# Altium PCB PenguinPi.PcbDoc
Units mil, origin at the board's own origin, x right, y up, seen from the top; angles counter-clockwise.
Board outline 2559.11 x 3103.94 mil, 2 copper layers (Top Layer, Bottom Layer); 47 components, 56 nets, 233 pads, 54 vias.
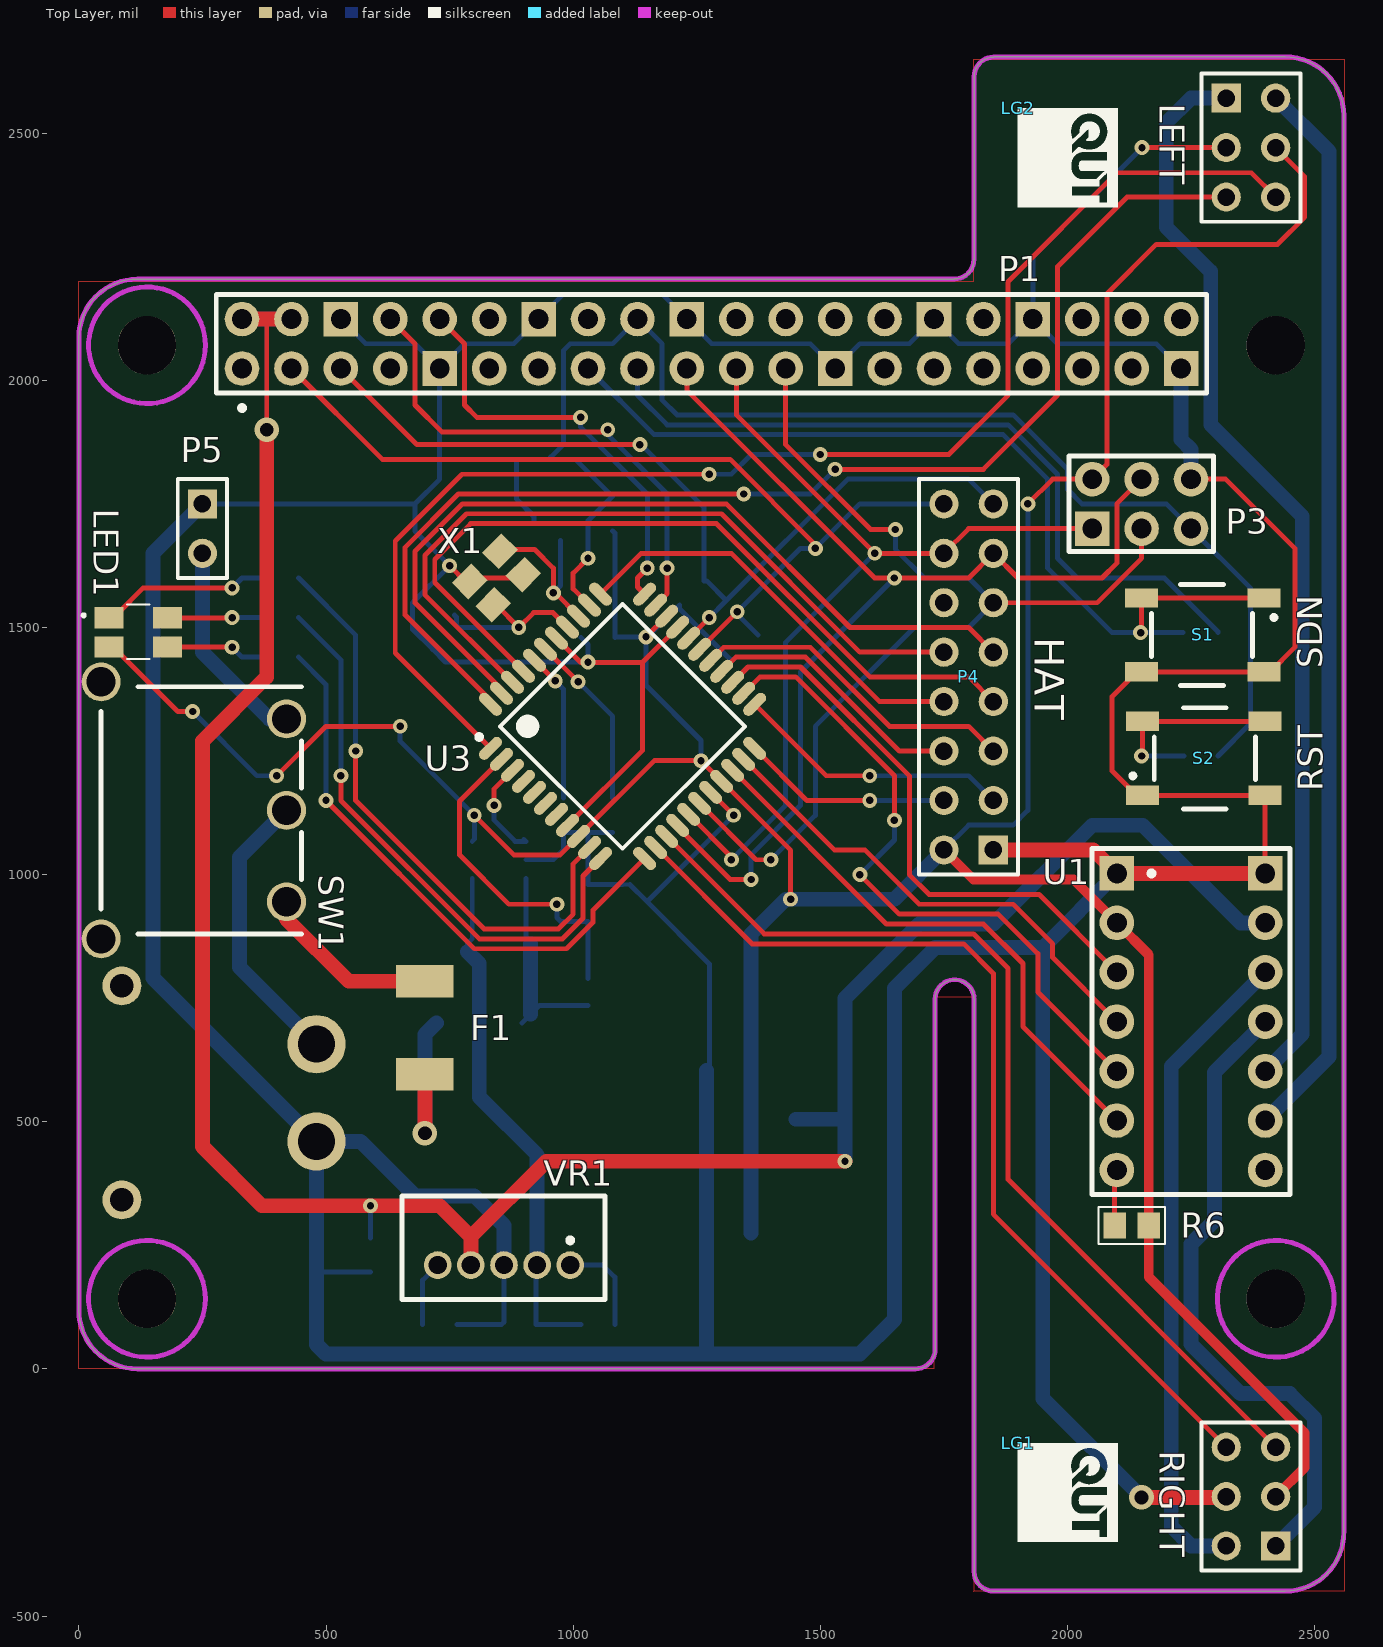
[diagram p0: Top Layer view]
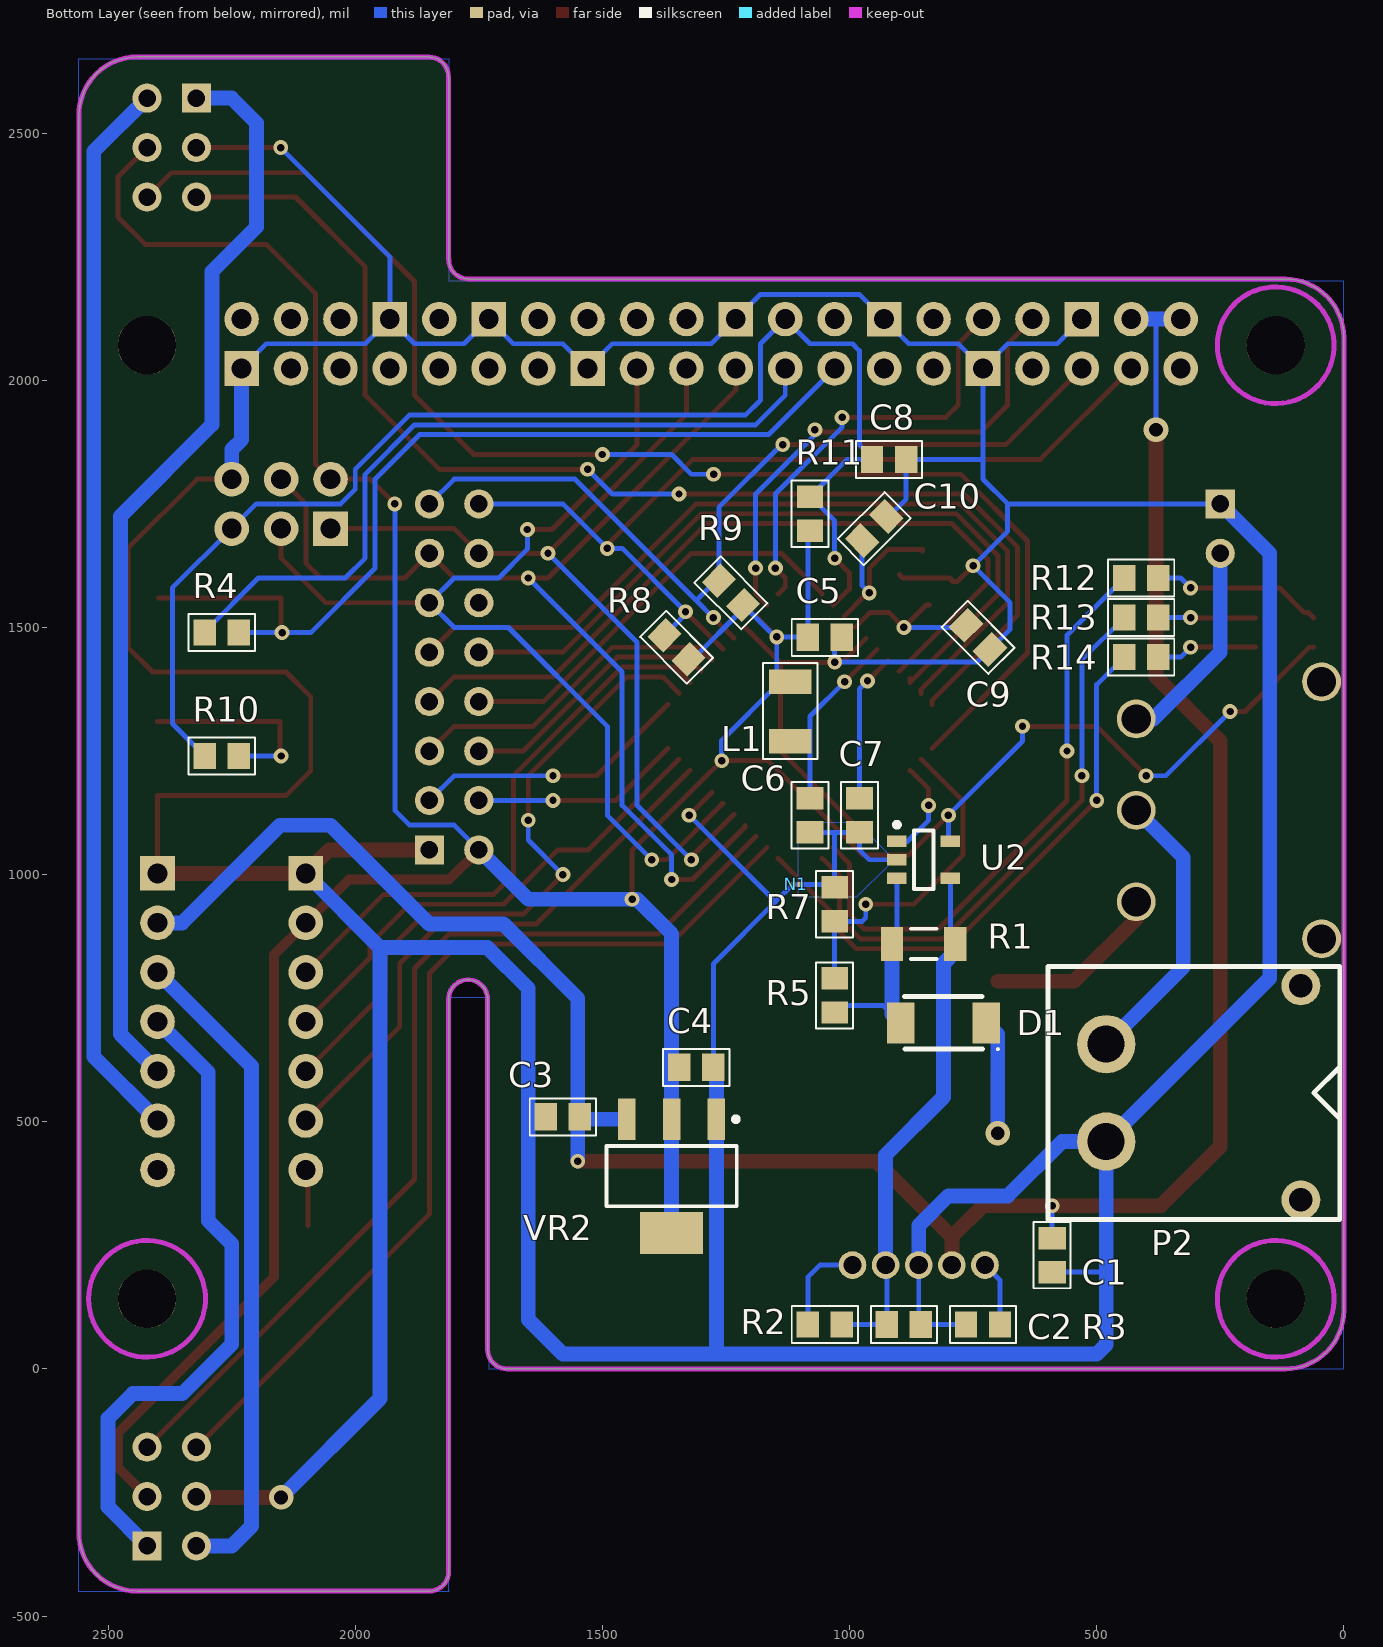
[diagram p1: Bottom Layer view, seen from below]
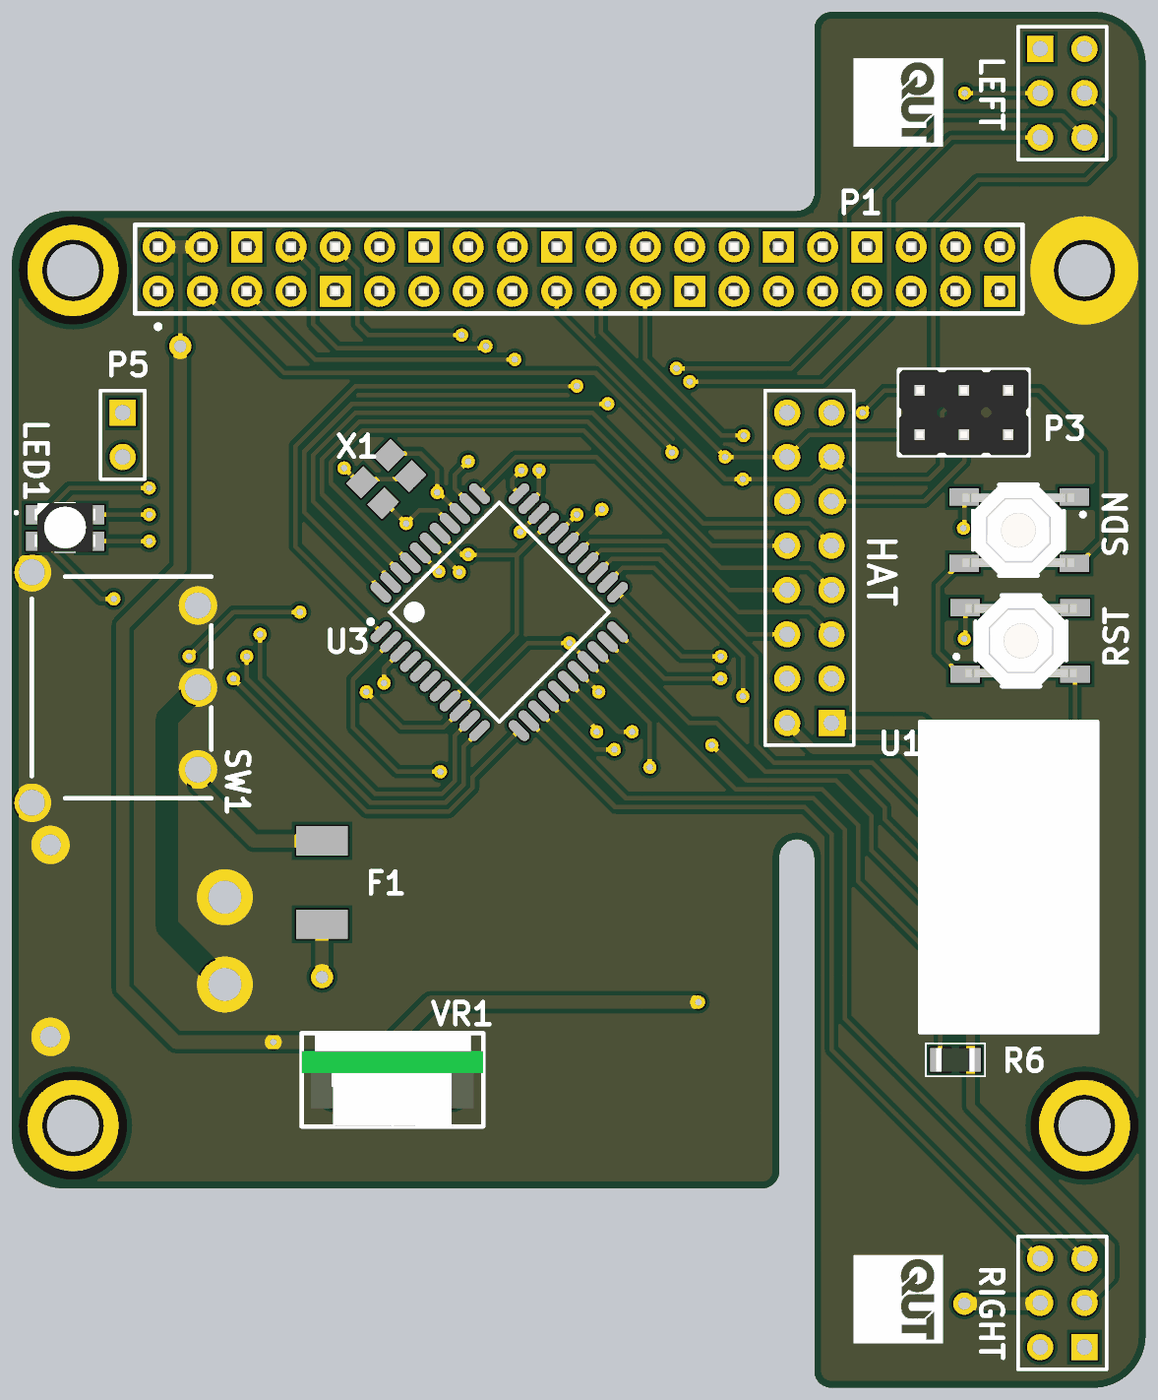
[diagram p2: 3D render of the assembled board from above, using the file's embedded part models]
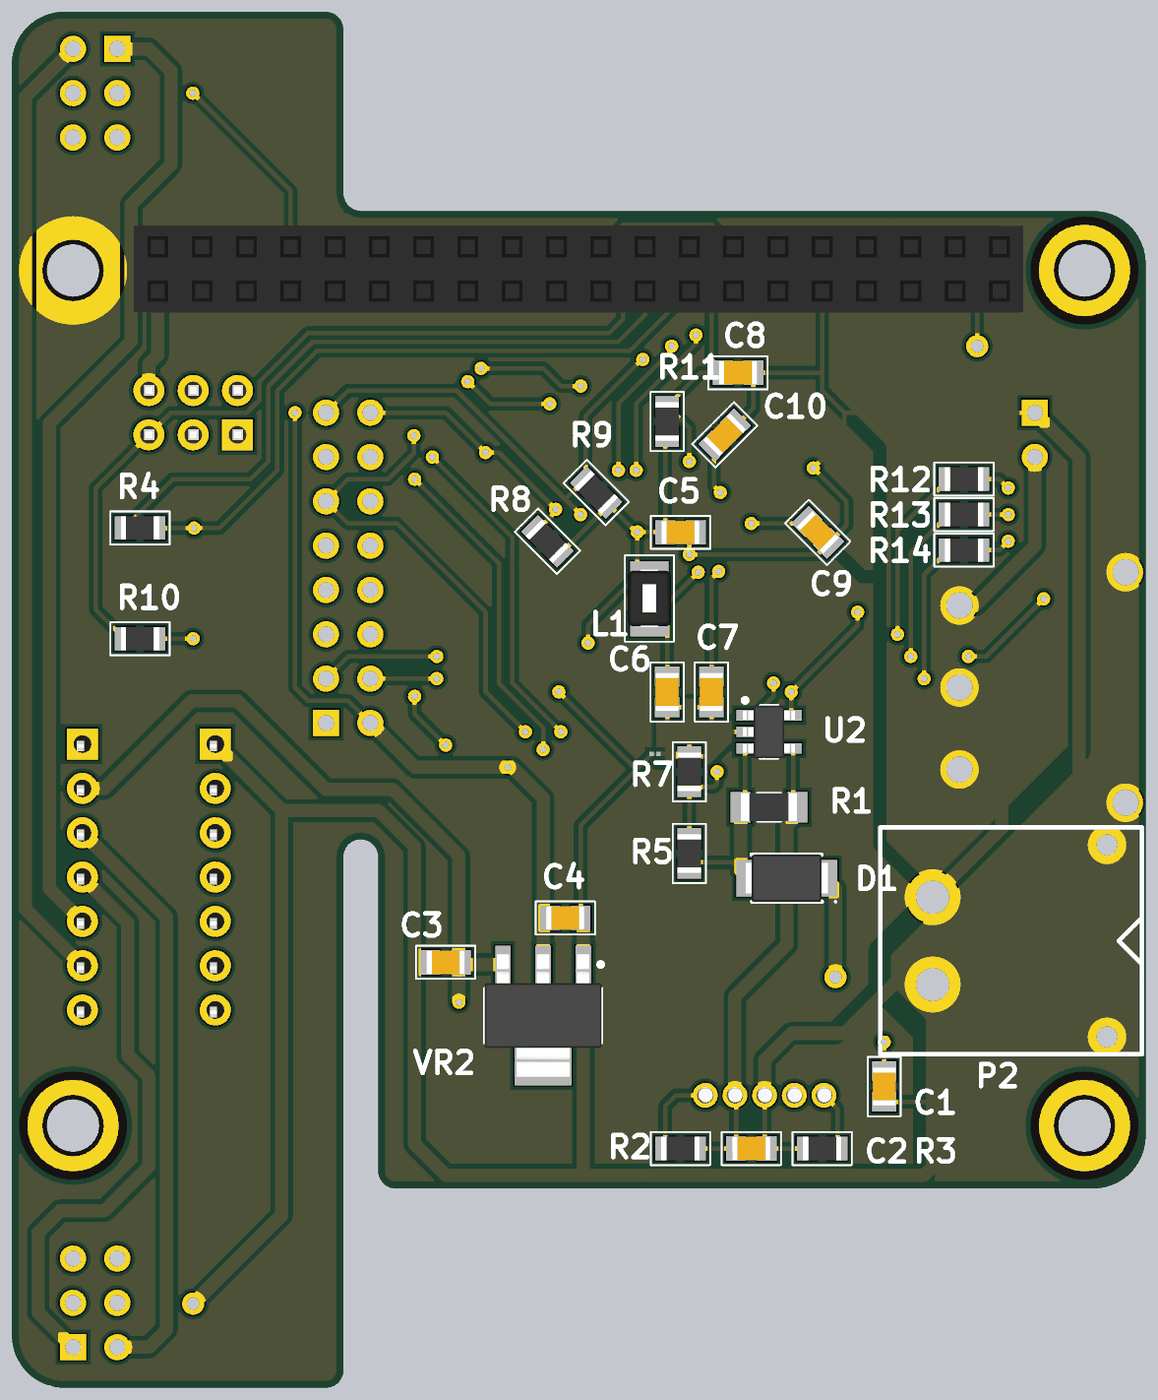
[diagram p3: 3D render of the assembled board from below, using the file's embedded part models]

## Layer stack, top to bottom
Top Solder: solder mask 0.4, Solder Resist, Dk 3.5
Top Layer: signal copper 1.4
Dielectric 1: dielectric 12.6, FR-4, Dk 4.8
Bottom Layer: signal copper 1.4
Bottom Solder: solder mask 0.4, Solder Resist, Dk 3.5

## Board outline
118.11,0 1692.91,0 ccw(c1692.91,39.37) 1732.28,39.37 1732.28,748.03 cw(c1771.65,748.03) 1811.02,748.03 1811.02,-410.24 ccw(c1850.39,-410.24) 1850.39,-449.61 2440.94,-449.61 ccw(c2440.94,-331.5) 2559.06,-331.5 2559.06,2536.22 2559.11,2536.22 ccw(c2441,2536.22) 2441,2654.33 1850.72,2654.33 1850.72,2654 ccw(c1850.72,2614.63) 1811.35,2614.63 1811.02,2614.63 1811.02,2244.42 1810.69,2244.42 cw(c1771.32,2244.42) 1771.32,2205.05 1771.32,2204.72 118.11,2204.72 ccw(c118.11,2086.61) 0,2086.61 0,118.11 ccw(c118.11,118.11)

## Design rules (kind name [scope] priority, off if disabled: settings)
Clearance [All] p1: gap=10
PolygonConnect [All] p1: connectstyle=Relief reliefconductorwidth=10 reliefentries=4 polygonreliefangle="90 Angle" airgapwidth=10
RoutingVias [All] p1: holewidth=28 width=50 viastyle="Through Hole" minholewidth=28 minwidth=50 maxholewidth=28 maxwidth=50
SolderMaskExpansion [All] p1: expansion=4
Width [All] p1: maxlimit=30 minlimit=10 preferedwidth=10
30 further rules are at their usual default settings.

## Classes and differential pairs
net class Power: 3V3 MA1 MA2 MB1 MB2 NetD1_1 NetD1_2 NetF1_1 VCC VIN

## Components (designator, comment, footprint, x,y, rotation, side; value= is the part's Value field where it differs from the comment)
C1 "CAP SMD" CAPC2012X07N 590,230 r90 bottom
C2 "CAP SMD" CAPC2012X07N 890,90 r0 bottom
C3 "CAP SMD" CAPC2012X07N 1580,510 r180 bottom
C4 "CAP SMD" CAPC2012X07N 1310,610 r0 bottom
C5 "CAP SMD" CAPC2012X07N 1050,1480 r0 bottom
C6 "CAP SMD" CAPC2012X07N 1080,1120 r90 bottom
C7 "CAP SMD" CAPC2012X07N 980,1120 r90 bottom
C8 "CAP SMD" CAPC2012X07N 920,1840 r0 bottom
C9 "CAP SMD" CAPC2012X07N 740,1480 r45 bottom
C10 "CAP SMD" CAPC2012X07N 950,1700 r315 bottom
D1 "SMD DIODE" SODFL470X110-2N 810,700 r0 bottom
F1 "RGEF250" MF-MSMF250/16X-2 700,690 r270 top
L1 "INDUCTOR SMD" CM322522 1120,1390.08 r270 bottom
LED1 "RGB SMD" "RGB SMD" 120,1490 r0 top
LEFT "Header 3X2" HDR2X3 2321.26,2570.87 r270 top locked
LG1 "QUT_Logo" QUT_Logo 1900,-150 r270 top
LG2 "QUT_Logo" QUT_Logo 1900,2550 r270 top
N1 "NETTIE" NETTIE-SMD-5mil 1114.76,980 r180 bottom net-tie
P1 "RPi Header" "RPI 2 Header" 330,2023.94 r90 top locked
P2 "XT30" "XT30 - PCB mount" 480.67,558.43 r270 bottom locked
P3 "Header 3x2" "Header 3x2 nonstandard" 2050,1700 r90 top
P4 "HAT" HDR2X8 1850,1050 r90 top
P5 "Charger" HDR1X2 250,1750 r270 top
R1 "RES SMD" RESC3216X06M 850,860 r180 bottom
R2 "RES SMD" RESC2012X07N 1050,90 r180 bottom
R3 "RES SMD" RESC2012X07N 730,90 r180 bottom
R4 "RES SMD" RESC2012X07N 2270,1490 r0 bottom
R5 "RES SMD" RESC2012X07N 1030,755.55 r270 bottom
R6 "RES SMD" RESC2012X07N 2130,290 r180 top
R7 "RES SMD" RESC2012X07N 1030,940 r270 bottom
R8 "RES SMD" RESC2012X07N 1350,1460 r225 bottom
R9 "RES SMD" RESC2012X07N 1240,1570 r225 bottom
R10 "RES SMD" RESC2012X07N 2270,1240 r0 bottom
R11 "RES SMD" RESC2012X07N 1080,1730 r270 bottom
R12 "RES SMD" RESC2012X07N 410,1600 r0 bottom
R13 "RES SMD" RESC2012X07N 410,1520 r0 bottom
R14 "RES SMD" RESC2012X07N 410,1440 r0 bottom
RIGHT "Header 3X2" HDR2X3 2421.26,-358.27 r90 top locked
S1 "SDN" E-SWITCH-TL3342 2398.03,1559.61 r180 top locked
S2 "RST" E-SWITCH-TL3342 2151.97,1160.39 r0 top locked
SW1 "PCB Switch" "PCB Switch" 420,1130 r270 top locked
U1 "DRV8835_CARRIER" DRV8835_CARRIER 2100,1002.36 r0 top locked
U2 "TSC888" SOT95P280X145-5N 850,1030 r180 bottom
U3 "ATxmega64A4U-AU" 44A_L 1100,1300 r45 top locked
VR1 "MURATA_OKR-T3-W12C" MURATA_OKR-Tn 994,210 r180 top
VR2 "3V3 LDO" SOT230P700X180-4N 1360,390 r270 bottom
X1 "32MHz" "XTAL AV Series" 845,1600 r225 top

## Footprints (in the part's own frame and the unit in brackets; to place one, negate y for a bottom-side part, rotate by r counter-clockwise, add the part's x,y. Pads: shape width x height; smd on the part's side, far side on the other; paste and mask are expansions set on the pad)
44A_L [mm] "Thin QFP, 44-Leads, Body 10x10mm, Pitch 0.8mm, IPC High Density"
  oval 1.45x0.55 smd: 1(-5.6,4) 2(-5.6,3.2) 3(-5.6,2.4) 4(-5.6,1.6) 5(-5.6,0.8) 6(-5.6,0) 7(-5.6,-0.8) 8(-5.6,-1.6) 9(-5.6,-2.4) 10(-5.6,-3.2) 11(-5.6,-4) 23(5.6,-4) 24(5.6,-3.2) 25(5.6,-2.4) 26(5.6,-1.6) 27(5.6,-0.8) 28(5.6,0) 29(5.6,0.8) 30(5.6,1.6) 31(5.6,2.4) 32(5.6,3.2) 33(5.6,4)
  oval 0.55x1.45 smd: 12(-4,-5.6) 13(-3.2,-5.6) 14(-2.4,-5.6) 15(-1.6,-5.6) 16(-0.8,-5.6) 17(0,-5.6) 18(0.8,-5.6) 19(1.6,-5.6) 20(2.4,-5.6) 21(3.2,-5.6) 22(4,-5.6) 34(4,5.6) 35(3.2,5.6) 36(2.4,5.6) 37(1.6,5.6) 38(0.8,5.6) 39(0,5.6) 40(-0.8,5.6) 41(-1.6,5.6) 42(-2.4,5.6) 43(-3.2,5.6) 44(-4,5.6)
  silkscreen extent -5.72,-4.45 4.45,4.95, body extent -5,-5 5,5, height 1.2
CAPC2012X07N [mm] "Chip Capacitor, 2-Leads, Body 2.00x1.25mm, IPC Medium Density"
  rect 1.15x1.4 smd: 1(-0.875,0) 2(0.875,0)
  silkscreen extent -1.7,-0.95 1.7,0.95, body extent -1.1,-0.67 1.1,0.67, height 0.7
CM322522 [mm] "BOURNS SMD INDUCTOR"
  rect 1.25x2.2 smd: 1(0,0) 2(3.05,0)
  silkscreen extent -0.97,-1.4 3.98,1.4, body extent -0.15,-1.25 3.15,1.25, height 2.2
DRV8835_CARRIER [mil]
  rect 70x70 hole 40: 1(0,0) 14(300,0)
  round 70 hole 40: 2(0,-100) 3(0,-200) 4(0,-300) 5(0,-400) 6(0,-500) 7(0,-600) 8(300,-600) 9(300,-500) 10(300,-400) 11(300,-300) 12(300,-200) 13(300,-100)
  silkscreen extent -50,-650 350,50, body extent -49,-651 351,49, height 417
E-SWITCH-TL3342 [mm]
  rect 1.7x1 smd: 1(0,0) 2(6.3,0) 3(0,3.8) 4(6.3,3.8)
  silkscreen extent -0.6,-0.7 5.8,4.5, body extent 0,-0.7 6.4,4.5, height 1.54
HDR1X2 [mm] "Connector; Header; 2 Position"
  rect 1.5x1.5 hole 0.9: 1(0,0)
  round 1.5 hole 0.9: 2(2.54,0)
  silkscreen extent -1.27,-1.27 3.81,1.27
HDR2X3 [mm] "Connector; Header; 3x2 Position"
  rect 1.5x1.5 hole 0.9: 1(0,0)
  round 1.5 hole 0.9: 2(0,2.54) 3(2.54,0) 4(2.54,2.54) 5(5.08,0) 6(5.08,2.54)
  silkscreen extent -1.27,-1.27 6.35,3.81
HDR2X8 [mm] "Connector; Header; 8x2 Position"
  rect 1.5x1.5 hole 0.9: 1(0,0)
  round 1.5 hole 0.9: 2(0,2.54) 3(2.54,0) 4(2.54,2.54) 5(5.08,0) 6(5.08,2.54) 7(7.62,0) 8(7.62,2.54) 9(10.16,0) 10(10.16,2.54) 11(12.7,0) 12(12.7,2.54) 13(15.24,0) 14(15.24,2.54) 15(17.78,0) 16(17.78,2.54)
  silkscreen extent -1.27,-1.27 19.05,3.81
"Header 3x2 nonstandard" [mil] "nonstandard, staggered pins"
  rect 70x70 hole 40: 1(0,0)
  round 70 hole 40: 2(100,0) 3(0,-100) 4(100,-100) 5(0,-200) 6(100,-200)
  silkscreen extent -46,-245 147,47, body extent -46,-246 147,47, height 331
MF-MSMF250/16X-2 [mm] "SMD Fuse"
  rect 1.68x2.95 smd: 1(-2.39,0) 2(2.39,0)
MURATA_OKR-Tn [mil] "Case C72"
  round 56 hole 37: 1(0,0) 2(67,0) 3(134,0) 4(201,0) 5(268,0)
  silkscreen extent -70,-140 340,70, body extent -70,-140 340,70, height 651
NETTIE-SMD-5mil [mil]
  rect 10x10 smd paste+0 mask+0: 1(0,0) 2(14.76,0)
  Top Layer lines w7.87: 13.78,0 0.98,0
"PCB Switch" [mm] "1101M2S3ABE2"
  round 2 hole 1.5: 0(-6.604,-9.525) 0(6.604,-9.525) 1(4.699,0) 2(0,0) 3(-4.699,0)
  silkscreen extent -6.35,-9.53 6.35,0.76
QUT_Logo [mil]
  silkscreen extent 0,0 200,202
RESC2012X07N [mm] "Chip Resistor, 2-Leads, Body 2.00x1.25mm, IPC Medium Density"
  rect 1.15x1.35 smd: 1(-0.875,0) 2(0.875,0)
  silkscreen extent -1.7,-0.95 1.7,0.95, body extent -1.1,-0.67 1.1,0.67, height 0.7
RESC3216X06M [mm] "Chip Resistor, 2-Leads, Body 3.20x1.60mm, IPC Low Density"
  rect 1.15x1.75 smd: 1(-1.625,0) 2(1.625,0)
  silkscreen extent -0.65,-0.77 0.65,0.77, body extent -1.61,-0.81 1.61,0.81, height 0.62
"RGB SMD" [mm] "WL-SFTW"
  rect 1.5x1.1 smd: 1(-1.5,0.75) 2(1.5,0.75) 3(1.5,-0.75) 4(-1.5,-0.75)
  silkscreen extent -2.83,-1.38 0.58,1.43, body extent -1.75,-1.38 1.75,1.43, height 2.05
"RPI 2 Header" [mil]
  round 70 hole 40: 1(0,0) 2(100,0) 3(0,-100) 4(100,-100) 5(0,-200) 7(0,-300) 8(100,-300) 10(100,-400) 11(0,-500) 12(100,-500) 13(0,-600) 15(0,-700) 16(100,-700) 17(0,-800) 18(100,-800) 19(0,-900) 21(0,-1000) 22(100,-1000) 23(0,-1100) 24(100,-1100) 26(100,-1200) 27(0,-1300) 28(100,-1300) 29(0,-1400) 31(0,-1500) 32(100,-1500) 33(0,-1600) 35(0,-1700) 36(100,-1700) 37(0,-1800) 38(100,-1800) 40(100,-1900)
  rect 70x70 hole 40: 6(100,-200) 9(0,-400) 14(100,-600) 20(100,-900) 25(0,-1200) 34(100,-1600) 39(0,-1900)
  rect 70x70 hole 40 mask+4: 30(100,-1400)
  silkscreen extent -85,-1952 150,52, body extent -48,-1954 149,54, height 374
SODFL470X110-2N [mm] "SODFL, 2-Leads, Body 2.50x4.70mm, IPC Medium Density"
  rect 1.4x2.1 smd: 1(-2.2,0) 2(2.2,0)
  silkscreen extent -2.85,-1.35 2.01,1.4, body extent -2.35,-1.35 2.35,1.35, height 1.1
SOT95P280X145-5N [mm] "SOT23, 5-Leads, Body 2.90x2.80mm, Pitch 0.95mm, IPC Medium Density"
  rect 1x0.6 smd: 1(-1.375,0.95) 2(-1.375,0) 3(-1.375,-0.95) 4(1.375,-0.95) 5(1.375,0.95)
  silkscreen extent -1.5,-1.5 0.5,1.92, body extent -1.5,-1.5 1.5,1.5, height 1.45
SOT230P700X180-4N [mm] "SOT223, 4-Leads, Body 6.50x7.00mm (avg), Pitch 2.30mm, IPC Medium Density"
  rect 2.15x0.9 smd: 1(-2.925,2.3) 2(-2.925,0) 3(-2.925,-2.3)
  rect 2.15x3.25 smd: 2(2.925,0)
  silkscreen extent -3.05,-3.35 1.55,3.42, body extent -3.5,-3.35 3.5,3.35, height 1.8
"XT30 - PCB mount" [mm] "Amass XT30PW"
  round 2 hole 1.2: 0(-5.5,10) 0(5.5,10)
  round 3 hole 1.9: 1(2.5,0) 2(-2.5,0)
  silkscreen extent -6.5,-3 6.5,12
"XTAL AV Series" [mm] "XTAL AV Series 3.2 x 2.5mm"
  rect 1.4x1.2 smd: 1(-1.1,-0.85) 2(1.1,0.85) GND(-1.1,0.85) GND(1.1,-0.85)

## Part data
C1 C2 C3 C4 C5 C6 C7 C8 C9 C10: "Surface mount capacitor"
D1: "Surface mount Diode"
F1: "PPTC Thermal Fuse"
L1: "Surface Mount Inductor - varying sizes"
LED1: "ASMB-MTB1-0A3A2"
LEFT RIGHT: "Header, 3-Pin, Dual row"
P1: library part "RPi 2 Header", "GPIO connector for Raspberry Pi Microcomputer"
P3: library part "Header 3x2 Staggered", "3 by 2 header, staggered pin arrangement"
P4: library part "Header 8X2", "Header, 8-Pin, Dual row"
P5: library part "Header 2", "Header, 2-Pin"
R1 R2 R3 R4 R5 R6 R7 R8 R9 R10 R11 R12 R13 R14: "0805 surface mount resistor"
S1 S2: library part E-SWITCH-PUSHBUTTON, "TL 3342 surface mount pushbutton"
U1: "DRV8835 Motor Controller"
U2: "Curent Sense Amplifier"
U3: library part CMP-0094-00068-2, "8/16-bit AVR XMEGA A4U Microcontroller, 1.6-3.6V, 32MHz, 64K + 4KB Flash, 2K EEPROM, 4K SRAM, 44-pin TQFP, Industrial Grade (-40°C to 85°C)"
VR1: "5V 3A switching voltage regulator"
VR2: "3.3 V Low Dropout Regulator"
X1: library part XTAL

## Free pads (board coordinates)
  round 118.11 hole 118.11 unplated mask+62.99: 0(137.8,141.73) 1(2421.26,141.73) 2(2421.26,2070.87) 3(137.8,2070.87)

## Via types
v1: diameter 30, hole 15, Top Layer to Bottom Layer, 51 vias
v2: diameter 50, hole 28, Top Layer to Bottom Layer, 3 vias

## Nets (pads, with @x,y where several pads share a name; then routed paths per layer and width w, separated by ;. In a path a pad name is that pad's centre, name@x,y a point inside that pad or via, vN(x,y) a via of type N, cw(c..) or ccw(c..) an arc to the next point about the centre after c; other vN are vias at no path point)
3V3: C4.2 C5.2 L1.1 LED1.4 LEFT.4 P3.2 P4.2 R6.1 R8.2 R9.2 R11.2 RIGHT.3 U1.2 U2.5 U3.9 U3.19 U3.31 VR2.2 | length 7662.7
  Top Layer w10: LED1.4 61.42,1460 70,1460 200,1330 v1(230,1330) ; v1(400,1200) 500,1300 v1(650,1300) ; v1(800,1120) 880,1040 973.63,1040 U3.9 1164.1,1230.48 v1(1258.61,1230.48) U3.19 1440,1049.08 v1(1440,950) ; v1(1147.25,1480.88) U3.31 ; v1(1920,1750) 1970,1800 P3.2 2080,1830 2080,2175 2180,2275 2425,2275 2480,2330 2480,2412.13 LEFT.4
  Top Layer w20: P4.2 1810,990 2012.36,990 U1.2 2164.45,837.91 R6.1 2164.45,185.55 2480,-130 2480,-199.53 RIGHT.3
  Bottom Layer w10: v1(230,1330) 360,1200 v1(400,1200) ; v1(650,1300) 650,1270 v1(800,1120) 800,1071.54 U2.5 ; R11.2 1084.45,1691.1 C5.2 1085.33,1480.88 v1(1147.25,1480.88) ; v1(1258.61,1230.48) 1258.61,1271.39 1147.25,1382.75 v1(1147.25,1480.88) ; R8.2 1317.39,1435.64 1215.64,1537.39 R9.2 1150.88,1480.88 v1(1147.25,1480.88) ; P4.2 1800,1100 1890,1100 1920,1130 v1(1920,1750)
  Bottom Layer w30: VR2.2@1360,274.84 1360,505.16 1360,880 1430,950 v1(1440,950) 1650,950 P4.2
AREF: C7.2 U3.40 | length 303.3
  Top Layer w10: U3.40 v1(963.66,1391.8)
  Bottom Layer w10: v1(963.66,1391.8) 980,1375.46 C7.2
CSENSE: U2.1 U3.3 | length 204
  Top Layer w10: v1(840,1140) 840,1173.63 U3.3
  Bottom Layer w10: v1(840,1140) 840,1110 882.6,1067.4 U2.1 U2.1@900,1071.54
ENCA1: LEFT.6 U3.1 | length 2744.3
  Top Layer w10: U3.1 640,1448.2 640,1675 775,1810 v1(1275,1810) ; v1(1500,1850) 1760,1850 1880,1970 1880,2200 2100,2420 2372.13,2420 LEFT.6
  Bottom Layer w10: v1(1275,1810) 1320,1810 1360,1850 v1(1500,1850)
ENCA2: LEFT.5 U3.44 | length 2496.4
  Top Layer w10: U3.44 832.75,1352.56 660,1525.31 660,1662.28 767.72,1770 v1(1345,1770) ; v1(1530,1820) 1830,1820 1980,1970 1980,2230 2120.87,2370.87 LEFT.5
  Bottom Layer w10: v1(1345,1770) 1480,1770 v1(1530,1820)
ENCB1: RIGHT.5 U3.14 | length 1994.1
  Top Layer w10: U3.14 1386.37,880 1810,880 1880,810 1880,382.99 RIGHT.5
ENCB2: RIGHT.6 U3.13 | length 1942.3
  Top Layer w10: U3.13 1361.83,860 1790,860 1850,800 1850,312.99 RIGHT.6
GND: C1.1 C2.1 C3.1 C4.1 C5.1 C8.1 C9.1 C10.1 LEFT.3 N1.1 P1.6 P1.9 P1.14 P1.20 P1.25 P1.30 P1.34 P1.39 P2.1 P3.6 P4.1 P5.1 R3.1 RIGHT.4 S1.3 S1.4 S2.1 S2.2 U1.1 U1.14 U3.8 U3.18 U3.30 U3.38 VR1.3 VR2.1 X1.GND | length 15401.1
  Top Layer w10: v1(750,1625) 781.96,1593.04 790.71,1593.04 797.67,1600 892.33,1600 X1.GND@899.29,1606.96 ; U3.38 1015.46,1429.08 1140,1429.08 ; U3.8 1140,1250.92 1140,1429.08 ; U3.30 1140,1429.08 ; U3.18 v1(1324.54,1120) ; v1(2150.87,2470.87) LEFT.3 ; P3.6 2320,1800 2460,1660 2460,1460 2410,1410 S1.3 S1.4 2140,1410 2090,1360 2090,1210 2139.61,1160.39 S2.1 S2.2 U1.14 ; RIGHT.4@2319.53,-260 RIGHT.4
  Top Layer w30: P4.1 2052.36,1050 U1.1 U1.14 ; v2(2150,-260) RIGHT.4@2319.53,-260
  Bottom Layer w10: P5.1 680,1750 ; 480.67,195.55 C1.1 ; P1.6 580,2073.94 680,2073.94 P1.9 ; R3.1 C2.1 860,94.45 VR1.3 ; C10.1@920.73,1713.06 920.73,1724.36 885.55,1759.54 C8.1 730,1840 ; C5.1 1030,1465.55 v1(1030,1430) 741.28,1430 C9.1 675,1496.28 675,1550 v1(750,1625) 680,1695 680,1750 ; N1.1 1150,944.76 ; C4.1@1269.45,603.9 C4.1 1275.55,819.21 1150,944.76 ; v1(1324.54,1120) 1150,945.46 1150,944.76 ; v1(2150.87,2470.87) 1930,2250 P1.34 ; P1.39 2180,2073.94 1980,2073.94 P1.34 ; 680,1750 730,1800 730,1840 ; 730,1840 P1.9 ; P1.9 780,2073.94 880,2073.94 P1.14 980,2173.94 1180,2173.94 P1.20 1280,2073.94 1480,2073.94 P1.25 1580,2073.94 1680,2073.94 P1.30 1780,2073.94 1880,2073.94 P1.34
  Bottom Layer w30: P5.1 150,1650 150,790.67 P2.1 ; VR1.3 860,290 800,350 680,350 570,460 P2.1 ; C4.1@1269.45,603.9 VR2.1 1269.45,30 ; U1.1 1950,852.36 ; v2(2150,-260) 1950,-60 1950,852.36 ; P1.39 2230,1880 2250,1860 P3.6 ; P2.1 480.67,195.55 480.67,49.33 500,30 1269.45,30 ; 1269.45,30 1580,30 1650,100 1650,770 1732.36,852.36 1950,852.36
HAT_00: P4.3 U3.23 | length 563.3
  Top Layer w10: U3.23 1511.8,1200 v1(1600,1200)
  Bottom Layer w10: v1(1600,1200) 1800,1200 P4.3
HAT_01: P4.5 U3.27 | length 669.7
  Top Layer w10: U3.27 1304.54,1460 1480,1460 1640,1300 1800,1300 P4.5
HAT_02: P4.7 U3.41 | length 1609.6
  Top Layer w10: U3.41 720,1590.92 720,1637.43 792.57,1710 1290,1710 1600,1400 1800,1400 P4.7
HAT_03: P4.9 U3.43 | length 1693.7
  Top Layer w10: U3.43 855.02,1374.83 680,1549.85 680,1653.99 776.01,1750 1310,1750 1560,1500 1800,1500 P4.9
HAT_04: P4.10 U3.42 | length 1539
  Top Layer w10: U3.42@877.29,1397.1 U3.42 700,1566.37 700,1645.71 784.29,1730 1300,1730 1580,1450 P4.10
HAT_05: P4.8 U3.34 | length 853.5
  Top Layer w10: U3.34 1055.46,1567.88 1137.57,1650 1320,1650 1620,1350 P4.8
HAT_06: P4.6 U3.26 | length 540.1
  Top Layer w10: U3.26 1329.08,1440 1470,1440 1660,1250 P4.6
HAT_07: P4.4 U3.22 | length 426.4
  Top Layer w10: U3.22 1472.71,1150 v1(1600,1150)
  Bottom Layer w10: v1(1600,1150) P4.4
LED-B: R14.2 U3.12 | length 1172
  Top Layer w10: v1(500,1150) 800,850 986.57,850 1040,903.43 1040,928.2 U3.12
  Bottom Layer w10: R14.2 500,1384.45 v1(500,1150)
LED-G: R13.2 U3.11 | length 1164.4
  Top Layer w10: v1(530,1200) 530,1150 810,870 978.28,870 1020,911.72 1020,997.29 U3.11
  Bottom Layer w10: R13.2 530,1434.45 v1(530,1200)
LED-R: R12.2 U3.10 | length 1206.7
  Top Layer w10: v1(560,1250) 560,1150 820,890 970,890 1000,920 1000,1021.83 U3.10
  Bottom Layer w10: R12.2 560,1484.45 v1(560,1250)
MA1: LEFT.2 U1.9 | length 2166.6
  Bottom Layer w30: U1.9 2529.06,631.42 2529.06,2463.07 LEFT.2
MA2: LEFT.1 U1.10 | length 2205.4
  Bottom Layer w30: LEFT.1 2250,2570.87 2200,2520.87 2200,2310 2290,2220 2290,1910 2475,1725 2475,677.36 U1.10
MAPH: U1.6 U3.20 | length 1145.6
  Top Layer w10: U3.20 1633.63,900 1830,900 1910,820 1910,692.36 U1.6
MAPWM: U1.5 U3.24 | length 1360.8
  Top Layer w10: U3.24 1378.17,1400 1450,1400 1650,1200 v1(1650,1110) ; v1(1580,1000) 1660,920 1860,920 1940,840 1940,762.36 U1.5
  Bottom Layer w10: v1(1580,1000) 1650,1070 v1(1650,1110)
MB1: RIGHT.1 U1.11 | length 1317.5
  Bottom Layer w30: U1.11 2297.39,599.76 2297.39,300 2250,252.61 2250,50 2350,-50 2450,-50 2500,-100 2500,-279.53 RIGHT.1
MB2: RIGHT.2 U1.12 | length 1327.2
  Bottom Layer w30: RIGHT.2 2250,-358.27 2210,-318.27 2210,612.36 U1.12
MBPH: U1.4 U3.21 | length 1008.6
  Top Layer w10: U3.21 1528.17,1050 1590,1050 1700,940 1890,940 1970,860 1970,832.36 U1.4
  Bottom Layer w10: U1.4@2087.64,690 U1.4
MBPWM: U1.3 U3.25 | length 1180.6
  Top Layer w10: U3.25 1353.63,1420 1460,1420 1680,1200 1680,1000 1720,960 1942.36,960 U1.3
  Bottom Layer w10: U1.3@2087.64,790 U1.3
MISO: P1.21 P3.1 P4.14 U3.16 | length 1818.4
  Top Layer w10: U3.16 1320,1035.46 v1(1320,1030) ; P1.21 1330,1930 v1(1610,1650) P4.14 1800,1700 P3.1
  Bottom Layer w10: v1(1320,1030) 1430,1140 1430,1470 v1(1610,1650)
MOSI: P1.19 P3.4 P4.13 U3.15 | length 2242
  Top Layer w10: U3.15 1211.36,1096.22 1317.57,990 v1(1360,990) ; P1.19 1230,1980 1610,1600 v1(1650,1600) 1800,1600 P4.13 1900,1600 2070,1600 2100,1630 2100,1750 P3.4
  Bottom Layer w10: v1(1360,990) 1360,1040 1460,1140 1460,1410 v1(1650,1600)
NetC6_2: C6.2 L1.2 U3.39 | length 357.7
  Top Layer w10: U3.39 v1(1010,1390)
  Bottom Layer w10: v1(1010,1390) 1080,1320 C6.2
NetC9_2: C9.2 U3.37 X1.2 | length 344.1
  Top Layer w10: X1.2 844.29,1545.71 v1(890,1500) 920,1530 959.08,1530 U3.37
  Bottom Layer w10: C9.2@760,1525 763.72,1521.28 763.72,1505 C9.2 768.72,1500 v1(890,1500)
NetC10_2: C10.2 U3.36 X1.1 | length 359.8
  Top Layer w10: X1.1 851.96,1658.15 921.85,1658.15 960,1620 v1(960,1570) 963.63,1570 U3.36
  Bottom Layer w10: v1(960,1570) 974.36,1584.36 C10.2
NetD1_1: D1.1 F1.2 | length 352.4
  Top Layer w30: v2(700,476.61) F1.2
  Bottom Layer w30: v2(700,476.61) 700,676.61 D1.1
NetD1_2: D1.2 R1.1 R5.2 U2.3 | length 427.4
  Bottom Layer w10: D1.2 913.98,717.36 932.17,735.55 R5.2@1030,735.55 ; U2.3 904.13,869.84 R1.1
  Bottom Layer w30: D1.2@913.98,717.36 R1.1
NetF1_1: F1.1 SW1.1 | length 367.2
  Top Layer w30: SW1.1 420,910 545.91,784.09 F1.1
NetLED1_1: LED1.1 R12.1 | length 347.9
  Top Layer w10: LED1.1 71.42,1530 80,1530 130,1580 v1(310,1580)
  Bottom Layer w10: v1(310,1580) 330,1600 R12.1
NetLED1_2: LED1.2 R13.1 | length 196.7
  Top Layer w10: LED1.2 309.53,1519.53 v1(310,1520)
  Bottom Layer w10: v1(310,1520) R13.1
NetLED1_3: LED1.3 R14.1 | length 204.3
  Top Layer w10: LED1.3 v1@309.53,1460.47
  Bottom Layer w10: v1(310,1460) 330,1440 R14.1
NetP1_15: P1.15 R4.1 S1.1 S1.2 | length 1846.4
  Top Layer w10: v1@2150,1491.57 S1.2 S1.1
  Bottom Layer w10: P1.15 1163.94,1890 1870,1890 1960,1800 1960,1620 2090.39,1489.61 v1(2148.03,1489.61) R4.1@2233.58,1489.61
NetP1_17: P1.17 R4.2 | length 1527.7
  Bottom Layer w10: P1.17 1130,1970 1190,1910 1880,1910 1980,1810 1980,1640 2020,1600 2195.98,1600 2304.45,1491.53 R4.2
NetP2_2: P2.2 SW1.2 | length 577
  Bottom Layer w30: SW1.2 325,1035 325,812.52 P2.2
NetP5_2: P5.2 SW1.3 | length 425.9
  Bottom Layer w30: P5.2 250,1450 385,1315 SW1.3
NetR2_1: R2.1 VR1.1 | length 196.1
  Bottom Layer w10: VR1.1 1060,210 1084.45,185.55 R2.1
NetR3_2: R3.2 VR1.5 | length 132.6
  Bottom Layer w10: R3.2 695.55,179.55 VR1.5
NetR6_2: R6.2 U1.7 | length 114.2
  Top Layer w10: R6.2 2095.55,397.91 U1.7
NetR10_1: R10.1 S2.3 S2.4 | length 404.4
  Top Layer w10: v1(2150,1240) 2151.97,1241.97 S2.3 S2.4
  Bottom Layer w10: v1(2150,1240) R10.1
RST: C8.2 P1.18 P3.5 R10.2 R11.1 U3.35 | length 2754.2
  Top Layer w10: v1(1030,1640) 1000,1610 1000,1578.17 U3.35
  Bottom Layer w10: v1(1030,1640) 1030,1715.98 1078.47,1764.45 R11.1 1004.45,1840 C8.2 954.45,1844.45 980,1870 980,2060 993.94,2073.94 1080,2073.94 P1.18 1180,2073.94 1180,1960 1210,1930 1890,1930 2000,1820 2000,1779.29 2029.29,1750 2200,1750 P3.5 2370,1580 2370,1305.55 R10.2
RX: P1.8 U3.32 | length 1023.8
  Top Layer w10: P1.8 680,2073.94 680,1950 735,1895 1065,1895 v1(1070,1900) ; U3.32 1190,1568.17 v1(1190,1620)
  Bottom Layer w10: v1(1070,1900) 1070,1890 1190,1770 v1(1190,1620)
SCL: P1.5 P4.15 R9.1 U3.29 | length 1832
  Top Layer w10: P1.5 683.94,1870 v1(1135,1870) ; U3.29 v1(1275.46,1520)
  Bottom Layer w10: v1(1135,1870) 1137.57,1870 1264.36,1743.21 R9.1 1270.18,1594.36 1310,1554.54 ; v1(1275.46,1520) 1310,1554.54 ; P4.15 1800,1800 1555.46,1800 1310,1554.54
SCLK: P1.23 P3.3 P4.11 U3.17 | length 2091.8
  Top Layer w10: U3.17@1258.32,1144.1 U3.17 1370,1030 v1(1400,1030) ; P1.23 1430,1870 1601.83,1698.17 v1(1651.83,1698.17) ; P4.11 2060,1550 2150,1640 P3.3
  Bottom Layer w10: v1(1400,1030) 1490,1120 1490,1300 1690,1500 1800,1500 P4.11 1800,1600 1710,1600 1651.83,1658.17 v1(1651.83,1698.17)
SDA: P1.3 P4.16 R8.1 U3.28 | length 1896.1
  Top Layer w10: P1.3 613.94,1840 1317.43,1840 1490,1667.43 v1(1490,1660) ; U3.28 v1(1331.83,1531.83)
  Bottom Layer w10: R8.1 1331.83,1526.89 v1(1331.83,1531.83) 1460,1660 v1(1490,1660) 1580,1750 P4.16
SGND: C6.1 C7.1 N1.2 R7.1 U2.2 | length 395.3
  Bottom Layer w10: U2.2 960,1030 980,1050 C7.1 1030,1085.55 ; C6.1 1030,1085.55 ; N1.2 1030,980 1030,1085.55
TX: P1.10 U3.33 | length 868
  Top Layer w10: P1.10 780,2073.94 780,1950 805,1925 v1(1015,1925) ; U3.33 1130,1581.8 1130,1600 v1(1150,1620)
  Bottom Layer w10: v1(1015,1925) 1015,1905 1150,1770 v1(1150,1620)
V_DIV: R5.1 R7.2 U3.2 | length 683.9
  Top Layer w10: U3.2 770,1148.17 770,1040 870,940 v1(967.17,940)
  Bottom Layer w10: v1@975.55,940 v1(967.17,940) 967.17,912.83 974.45,905.55 R7.2 R5.1
VCC: C1.2 C3.2 P1.2 P1.4 U1.13 VR1.4 VR2.3 | length 5210.4
  Top Layer w10: v2(380,1900) 380,2123.94
  Top Layer w30: P1.2 380,2123.94 P1.4 ; v2(380,1900) 380,1400 250,1270 250,450 370,330 v1(590,330) 730,330 793,267 ; VR1.4 793,267 ; v1(1550,420) 946,420 793,267
  Bottom Layer w10: v2(380,1900) 380,2123.94 ; C1.2 v1(590,330)
  Bottom Layer w30: P1.2 P1.4 ; VR2.3 C3.2@1540.71,505.16 ; v1(1550,420) 1550,750 1700,900 1850,900 2050,1100 2152.36,1100 2350,902.36 U1.13
VIN: C2.2 R1.2 R2.2 U2.4 VR1.2 | length 1057.2
  Bottom Layer w10: R1.2@786.02,843.98 R1.2 795.87,869.84 U2.4 ; VR1.2 924.45,207.45 C2.2 R2.2
  Bottom Layer w30: R1.2@786.02,843.98 810,820 810,550 927,433 VR1.2
pads on no net: P1.1 P1.7 P1.11 P1.12 P1.13 P1.16 P1.22 P1.24 P1.26 P1.27 P1.28 P1.29 P1.31 P1.32 P1.33 P1.35 P1.36 P1.37 P1.38 P1.40 P2.0 P4.12 SW1.0 U1.8 U3.4 U3.5 U3.6 U3.7

## Polygon pours and split planes (outlines as drawn)
SGND on Bottom Layer "Bottom Layer-SGND" (solid, shelved, pour order 4): 920,1040 985,1105 1105,1105 1105,955 1104.7,954.7 993.43,954.7 985.3,954.7 920,1020
no net on Bottom Layer "Bottom Layer-GND" (solid, shelved, pour order 8): 150,0 0,0 0,150 0,2070 0,2200 65,2200 105,2200 140,2200 1810,2200 1810,2650 2560,2650 2560,-450 1810,-450 1811.02,-448.98 1811.02,751.97 1732.28,751.97 1730,749.68 1730,0
no net on Top Layer "Bottom Layer-GND" (solid, shelved, pour order 12): 150,0 0,0 0,150 0,2070 0,2200 65,2200 105,2200 140,2200 1810,2200 1810,2650 2560,2650 2560,-450 1810,-450 1811.02,-448.98 1811.02,751.97 1732.28,751.97 1730,749.68 1730,0

## Keep-outs
Keep-Out Layer:
  circle w10: c137.8,141.73 r118.18
  circle w10: c2421.26,141.73 r118.18
  circle w10: c137.8,2070.87 r118.11
  lines w10: 1771.32,2204.72 118.11,2204.72 ccw(c118.11,2086.61) 0,2086.61 0,1476.38 0,118.11 ccw(c118.11,118.11) 118.11,0 1692.91,0 ccw(c1692.91,39.37) 1732.28,39.37 1732.28,748.03 cw(c1771.65,748.03) 1811.02,748.03 1811.02,-410.24 ccw(c1850.39,-410.24) 1850.39,-449.61 2440.95,-449.61 ccw(c2440.95,-331.5) 2559.06,-331.5 2559.06,2536.22 ; 1771.32,2205.05 ccw(c1771.32,2244.42) 1810.69,2244.42 ; 1811.02,2244.42 1811.02,2614.63 ; 1811.35,2614.63 cw(c1850.72,2614.63) 1850.72,2654 ; 1850.72,2654.33 2441,2654.33 cw(c2441,2536.22) 2559.11,2536.22

## Silkscreen, mask and mechanical layers (free items; w line width, h text height)
Mechanical 1:
  lines w10: 1771.32,2204.72 118.11,2204.72 ccw(c118.11,2086.61) 0,2086.61 0,1476.38 0,118.11 ccw(c118.11,118.11) 118.11,0 1692.91,0 ccw(c1692.91,39.37) 1732.28,39.37 1732.28,748.03 cw(c1771.65,748.03) 1811.02,748.03 1811.02,-410.24 ccw(c1850.39,-410.24) 1850.39,-449.61 2440.94,-449.61 ccw(c2440.94,-331.5) 2559.06,-331.5 2559.06,2536.22 ; 1771.32,2205.05 ccw(c1771.32,2244.42) 1810.69,2244.42 ; 1811.02,2244.42 1811.02,2614.63 ; 1811.35,2614.63 cw(c1850.72,2614.63) 1850.72,2654 ; 1850.72,2654.33 2441,2654.33 cw(c2441,2536.22) 2559.11,2536.22